# EAGLE board OnStep Box BRD (EAGLE 9.6.2)
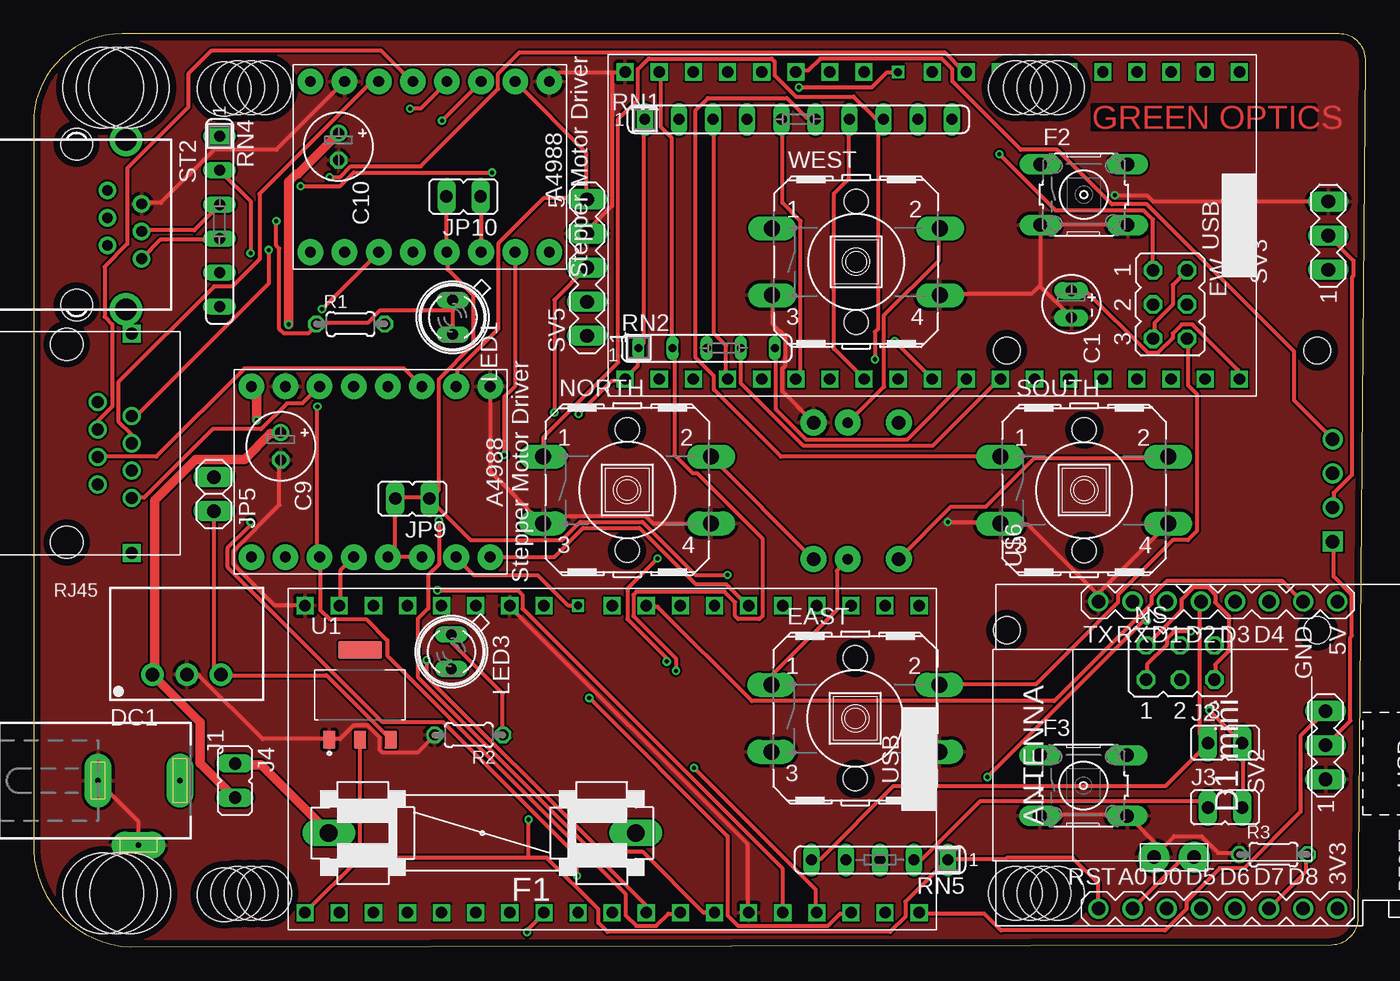
[diagram p0: board, top side]
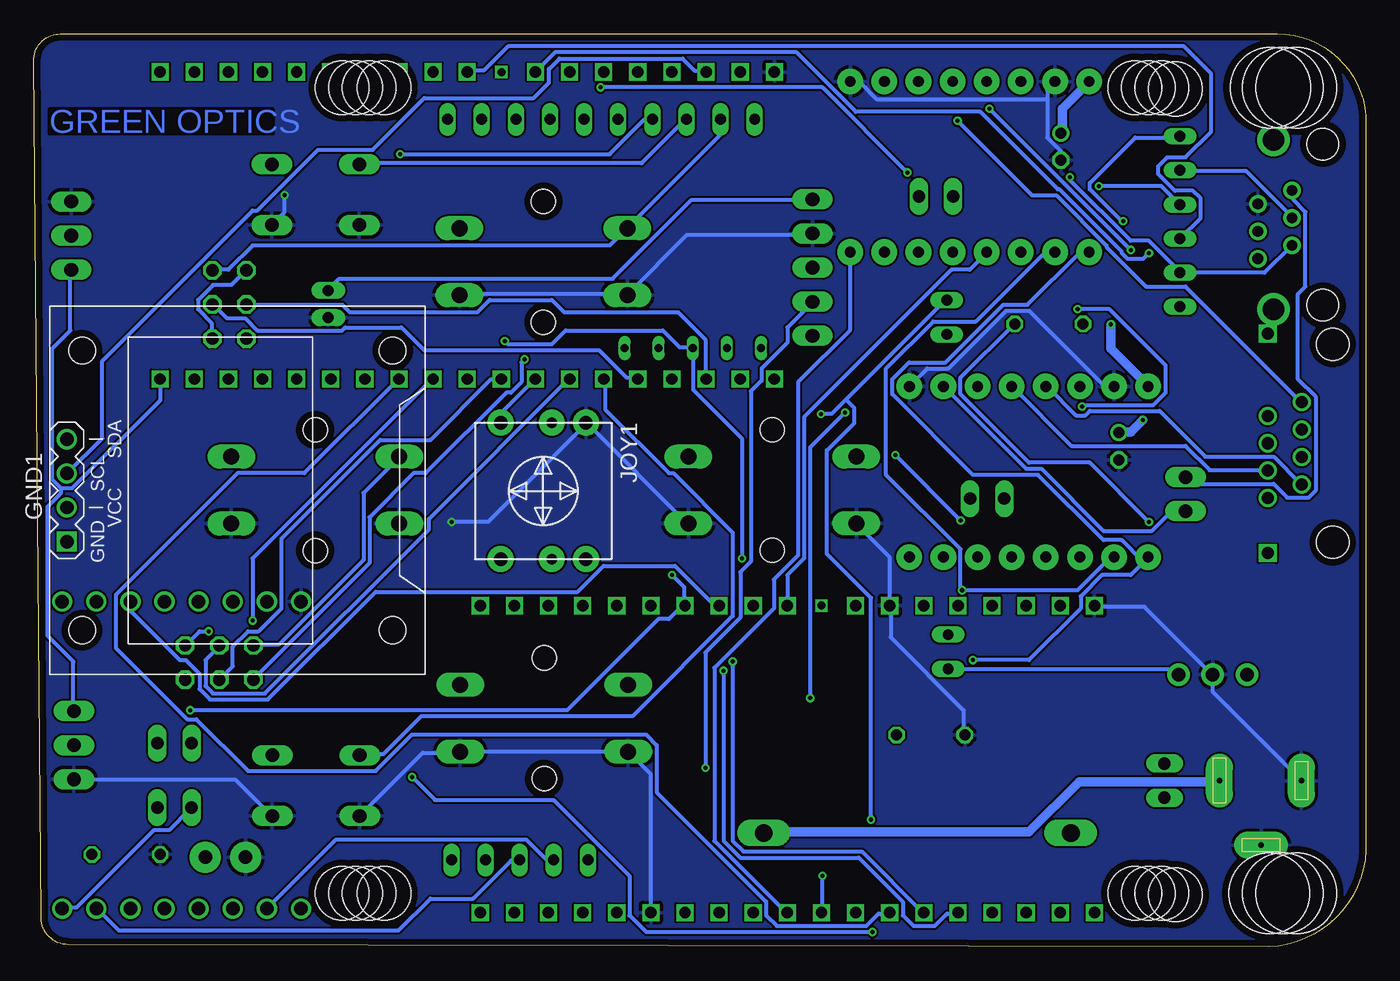
[diagram p1: board, bottom side, seen from below]

Size 99.18 x 68.01 mm. Coordinates in mm from the lower left corner, seen from the top.
Outline: 97.18,67.99 7.2,67.99 arc90 0,61.89 0,7.9 arc90 7.21,0 96.62,0.18 arc89 98.62,2.16 99.18,65.97 arc91 97.18,67.99
Copper layers (1*16): Top 0.035mm / dielectric 1.6mm / Bottom 0.035mm
Design rules "Elecrow_2-layer_PCB_eagle_rule": minimum track width 6mil, minimum drill 12mil, track to track 6mil, track to pad 6mil, pad to pad 6mil, via to via 8mil, smd to smd 0mil, copper to edge 20mil, drill to drill 10mil, minimum pad ring 6mil, minimum via ring 6mil, stop-mask expansion 0mil, vias tented up to drill 100mil, thermal gap 10mil
Net classes: 0 default: width 0.3 mm; 1 24v: width 0.7 mm; 2 SPM: width 0.3 mm; 3 New Class: width 0.7 mm
Holes 6 mm at 6.2,3.99 6.2,63.99 5.2,63.99 7.1,63.99 5.2,3.99 7.2,3.99
Holes 4 mm at 16.2,3.99 16.2,63.99 75.2,3.99 75.2,63.99 15.2,63.99 17.2,63.99 15.2,3.99 17.2,3.99 74.2,3.99 76.2,3.99 74.2,63.99 76.2,63.99 14.2,3.89 73.1,3.99 73.1,63.99 14.2,63.89

## Footprints (pad centres in the part's own frame; a part is rotated, then mirrored left to right if it is on the bottom)
E2-4 = drill 0.813 pad 1.27 long: + -1.016,0; - 1.016,0
E2-5 = drill 0.813 pad 1.27: + -1.016,0 | drill 0.813 pad 1.27 octagon: - 1.016,0
CERAMIC_CAPACITOR = drill 1 pad 2.3: P$1 0,0; P$2 0,3
SIP3 = drill 1 pad 1.676: 1 -2.54,0; 2 0,0; 3 2.54,0
B3F-40XX = drill 1.194 long: 1 -6.248,2.489; 2 6.248,2.489; 3 -6.248,-2.489; 4 6.248,-2.489 | hole 1.803: 0,-4.496; 0,4.496
JP3Q = drill 0.914 octagon: 1 -2.54,-1.27; 2 -2.54,1.27; 3 0,-1.27; 4 0,1.27; 5 2.54,-1.27; 6 2.54,1.27
FUSE = drill 1.321 long: 1 -11.43,0; 2 11.43,0
B3F-10XX = drill 1.016 long: 1 -3.251,2.261; 2 3.251,2.261; 3 -3.251,-2.261; 4 3.251,-2.261
DISPLAY-OLED-128X64-I2C = drill 1 square: 1 -3.81,12.7 | drill 1: 2 -1.27,12.7; 3 1.27,12.7; 4 3.81,12.7 | hole 2: -10.414,11.557; 10.414,11.557; 10.414,-11.557; -10.414,-11.557
DCJ0202 = drill 0.4 pad 2 long: 1 0,3.1; 2 4.8,0; 3 0,-3
JP1 = drill 0.914 long: 1 0,-1.27; 2 0,1.27
JOYSTICK = drill 1 pad 1.93: 1 -5.08,3.175; 3 -5.08,-3.175; 4 5.08,-3.175; 6 5.08,3.175 | drill 0.8 pad 1.93: 2 -5.08,0.635; 5 5.08,0.635
1X02 = drill 1.016 long: 1 -1.27,0; 2 1.27,0
SFH480 = drill 0.813 long: A 1.27,0; K -1.27,0
0204/5 = drill 0.813 octagon: 1 -2.54,0; 2 2.54,0
PJ-J0 = drill 0.9: 1 0,0; 2 1.02,2.54; 3 2.04,0; 4 3.06,2.54; 5 4.08,0; 6 5.1,2.54; 7 6.12,0; 8 7.14,2.54 | drill 0.9 square: 9 -4.095,0; 10 12.255,0 | hole 2.4: -3.295,4.84; 11.455,4.84
SIL10 = drill 0.813 long: 1 -11.43,0; 2 -8.89,0; 3 -6.35,0; 4 -3.81,0; 5 -1.27,0; 6 1.27,0; 7 3.81,0; 8 6.35,0; 9 8.89,0; 10 11.43,0
SIP5 = drill 0.6 long: 1 -5.09,-0.03; 2 -2.55,-0.03; 3 -0.01,-0.03; 4 2.53,-0.03; 5 5.07,-0.03
SIL6 = drill 0.813 long: 1 -6.35,0; 2 -3.81,0; 3 -1.27,0; 4 1.27,0; 5 3.81,0; 6 6.35,0
SIL5 = drill 0.813 long: 1 -5.08,0; 2 -2.54,0; 3 0,0; 4 2.54,0; 5 5.08,0
YH-55-10 = drill 0.8 pad 1.3: 1 -2.54,2.3; 2 -1.54,4.84; 3 -0.5,2.3; 4 0.5,4.84; 5 1.54,2.3; 6 2.54,4.84 | drill 1.6 pad 2.184: S1 -6.3,3.68; S2 6.3,3.68 | hole 2.36: -6,0; 6,0
MA03-1 = drill 1.016 long: 1 -2.54,0; 2 0,0; 3 2.54,0
MA05-1 = drill 1.016 long: 1 -5.08,0; 2 -2.54,0; 3 0,0; 4 2.54,0; 5 5.08,0
SOT229P700X180-4N = smd 0.93 x 1.31: 1 -2.29,-3.345; 2 0,-3.345; 3 2.29,-3.345 | smd 3.24 x 1.31: 4 0,3.345
ESP32 = drill 0.85 square: 3.3V 1.27,46.99; 5V 1.27,1.27; EN 1.27,44.45; GND1 1.27,13.97; GND2 24.13,46.99; GND3 24.13,31.75; GPIO0 24.13,13.97; GPIO2 24.13,11.43; GPIO4 24.13,16.51; GPIO5 24.13,24.13; GPIO6 24.13,1.27; GPIO7 24.13,3.81; GPIO8 24.13,6.35; GPIO9 1.27,8.89; GPIO10 1.27,6.35; GPIO11 1.27,3.81; GPIO12 1.27,16.51; GPIO13 1.27,11.43; GPIO14 1.27,19.05; GPIO15 24.13,8.89; GPIO16 24.13,19.05; GPIO17 24.13,21.59; GPIO19 24.13,29.21; GPIO21 24.13,34.29; GPIO22 24.13,41.91; GPIO23 24.13,44.45; GPIO25 1.27,26.67; GPIO26 1.27,24.13; GPIO27 1.27,21.59; GPIO32 1.27,31.75; GPIO33 1.27,29.21; GPIO34 1.27,36.83; GPIO35 1.27,34.29; GPIO36 1.27,41.91; GPIO39 1.27,39.37; RX 24.13,36.83; TX 24.13,39.37 | drill 0.6 square: GPIO18 24.13,26.67
A4988_STEP = drill 0.8 pad 1.905: 1A 6.35,-1.27; 1B 6.35,-3.81; 2A 6.35,1.27; 2B 6.35,3.81; /EN -6.35,8.89; /RST -6.35,-1.27; /SLP -6.35,-3.81; DIR -6.35,-8.89; GND 6.35,6.35; GND2 6.35,-8.89; MS1 -6.35,6.35; MS2 -6.35,3.81; MS3 -6.35,1.27; STEP -6.35,-6.35; VDD 6.35,-6.35; VMOT 6.35,8.89
WEMOS-D1-MINI = drill 1: JP1.1 -11.43,9.525; JP1.2 -11.43,6.985; JP1.3 -11.43,4.445; JP1.4 -11.43,1.905; JP1.5 -11.43,-0.635; JP1.6 -11.43,-3.175; JP1.7 -11.43,-5.715; JP1.8 -11.43,-8.255; JP2.1 11.43,9.525; JP2.2 11.43,6.985; JP2.3 11.43,4.445; JP2.4 11.43,1.905; JP2.5 11.43,-0.635; JP2.6 11.43,-3.175; JP2.7 11.43,-5.715; JP2.8 11.43,-8.255

## Placement (x,y rotation side)
C1  100uF  [E2-4]  77.24,47.87 270 top
C9  100uF  [E2-5]  18.4,37.29 270 top
C10  100uF  [E2-5]  22.7,59.59 270 top
CERAMIC_CAPACITOR1  CERAMIC_CAPACITOR  [CERAMIC_CAPACITOR]  86.4,6.69 90 top
DC1  R-78C5.0-1.0  [SIP3]  11.4,20.29 0 top
EAST  [B3F-40XX]  61.17,17.03 0 top
EW  [JP3Q]  84.6,47.84 270 top
F1  [FUSE]  33.4,8.49 180 top
F2  [B3F-10XX]  78.19,56.02 0 top
F3  [B3F-10XX]  78.16,12.02 0 top
GND1  DISPLAY-OLED-128X64-I2C  [DISPLAY-OLED-128X64-I2C]  84.01,34 90 bottom
J1  DCJ0202  [DCJ0202]  7.8,12.39 270 top
J2  [JP1]  88.7,15.19 270 top
J3  [JP1]  88.7,10.39 270 top
J4  [JP1]  15,12.39 180 top
JOY1  JOYSTICK  [JOYSTICK]  61.24,33.96 270 bottom
JP5  [1X02]  13.42,33.72 270 top
JP9  [JP1]  28.2,33.39 90 top
JP10  [JP1]  32,55.89 90 top
LED1  [SFH480]  31.2,46.89 270 top
LED3  [SFH480]  31.1,21.99 270 top
NORTH  [B3F-40XX]  44.19,34.03 0 top
NS  [JP3Q]  85.36,21.19 0 top
R1  10k  [0204/5]  23.6,46.39 0 top
R2  10k  [0204/5]  32.4,15.79 180 top
R3  10k  [0204/5]  92.3,6.89 0 top
RJ45  C-00159_RJ45_AKITUKI  [PJ-J0]  7.31,33.43 90 top
RN1  [SIL10]  56.93,61.63 0 top
RN2  [SIP5]  50.12,44.63 0 top
RN4  [SIL6]  13.84,54.02 270 top
RN5  [SIL5]  63,6.49 180 top
SOUTH  [B3F-40XX]  78.21,34.02 0 top
ST2  YH-55-10  [YH-55-10]  3.2,53.79 270 top
SV2  [MA03-1]  96.18,15.03 90 top
SV3  [MA03-1]  96.38,52.97 90 top
SV5  [MA05-1]  41.2,50.59 90 top
U1  AMS1117-3.3  [SOT229P700X180-4N]  24.3,18.79 0 top
U$1  ESP32  [ESP32]  67.2,1.29 90 top
U$3  A4988_STEP  [A4988_STEP]  29.5,58.09 90 top
U$4  A4988_STEP  [A4988_STEP]  25.1,35.39 90 top
U$6  WEMOS-D1-MINI  [WEMOS-D1-MINI]  88.8,14.29 90 top
U$7  ESP32  [ESP32]  91.03,41.02 90 top
WEST  [B3F-40XX]  61.23,51.02 0 top

## Library data of the parts
C1 J1 = akihabara
C9 C10 = rcl; SPICEPREFIX: C
CERAMIC_CAPACITOR1 = capacitor
DC1 = dc-dc-converter
EAST NORTH SOUTH WEST = switch-omron; MF: OMRON COMPONENTS USA; MPN: B3F-4000; OC_FARNELL: 176434; OC_NEWARK: 36K3105
EW J2-J4 JP9 JP10 NS = jumper
F1 = special
F2 F3 = switch-omron; MPN: B3F-1000; OC_FARNELL: 176432; OC_NEWARK: 36M3542
GND1 U$6 = diy-modules
JOY1 = dp_devices
JP5 = pinhead
LED1 LED3 = LED
R1-R3 = rcl; SPICEPREFIX: R
RJ45 = Akizuki
RN1 RN4 RN5 = resistor-sil; OC_FARNELL: unknown; OC_NEWARK: unknown
RN2 = resistor-sip
ST2 = con-wenzhou-yihua; OC_FARNELL: unknown; OC_NEWARK: unknown
SV2 SV3 SV5 = con-lstb; OC_FARNELL: unknown; OC_NEWARK: unknown
U1 = AMS1117-3.3; AVAILABILITY: In Stock; DESCRIPTION: LDO Voltage Regulators 800MA LDO LINEAR REG; MF: Advanced Monolithic Systems; MP: AMS1117-3.3; PACKAGE: SOT-223 Seeed Technology; PRICE: None
U$1 U$7 = ESP32
U$3 U$4 = IC

## Nets
5V: U$6.JP2.8
24V [24v]: F1.1 J1.1
24V2 [24v]: F1.2 J4.1
24V3 [24v]: C9.+ C10.+ DC1.1 J4.2 U$3.VMOT U$4.VMOT
+5V: C1.+ DC1.3 JP5.2 LED3.A SV2.3 SV3.1 SV5.5 U1.3 U$1.5V U$3.VDD U$4.VDD U$7.5V
DE1+: RN4.5 ST2.5 U$7.GPIO17
DE1-: RN4.3 ST2.4 U$7.GPIO18
DE+: RN2.5 U$1.GPIO33 U$7.GPIO27
DE-: RN2.4 U$1.GPIO32 U$7.GPIO14
GND: C1.- C9.- C10.- CERAMIC_CAPACITOR1.P$2 DC1.2 EAST.3 EAST.4 F2.3 F2.4 F3.3 F3.4 J1.2 J1.3 JOY1.1 NORTH.3 NORTH.4 R2.2 R3.1 SOUTH.3 SOUTH.4 ST2.2 SV2.1 SV3.3 SV5.4 U1.1 U$1.GND1 U$1.GND2 U$1.GND3 U$3.GND U$3.GND2 U$4.GND U$4.GND2 U$6.JP2.1 U$7.GND2 WEST.3 WEST.4
N$1: GND1.1 SV2.2
N$2: LED3.K R2.1
N$3: R1.2 U$1.GPIO25
N$8: SV5.3 U$1.GPIO10
N$9: SV5.2 U$1.GPIO9
N$13: U$1.GPIO12 U$3./EN U$4./EN
N$14: U$1.GPIO13 U$3.MS1 U$4.MS1
N$15: U$1.GPIO14 U$3.MS2 U$4.MS2
N$20: JP10.1 U$3./SLP
N$21: U$1.GPIO26 U$3.DIR
N$22: U$1.GPIO27 U$3.STEP
N$23: U$1.GPIO23 U$4.MS3
N$24: J2.2 J3.2 JP9.1 JP9.2 JP10.2 U$1.GPIO4 U$3./RST U$4./RST U$4./SLP
N$25: J3.1 RN5.2 U$6.JP1.8
N$27: U$1.GPIO18 U$4.STEP
N$28: RJ45.4 U$4.1B
N$29 [SPM]: RJ45.5 U$3.2B
N$30 [SPM]: RJ45.8 U$3.1B
N$31: GND1.2 SV3.2
N$32 [SPM]: RJ45.7 U$3.1A
N$33: RN5.3 U$6.JP1.7
N$34 [SPM]: RJ45.6 U$3.2A
N$35: U$1.GPIO5 U$3.MS3
N$36: R3.2 U$6.JP1.6
N$37: CERAMIC_CAPACITOR1.P$1 RN5.4 U$6.JP1.2
N$38: U$1.GPIO0 U$4.DIR
N$40 [SPM]: RJ45.2 U$4.2A
N$42 [SPM]: RJ45.1 U$4.2B
N$45: J2.1 RN5.5 U$6.JP2.4
N$46 [SPM]: RJ45.3 U$4.1A
N$47: GND1.3 U$7.GPIO22
N$51: GND1.4 U$7.GPIO21
N$53: EW.3 U$7.GPIO36
N$54: EAST.2 EW.1 EW.6 RN1.4
N$55: NS.2 NS.5 RN1.6 SOUTH.1
N$58: JOY1.2 WEST.2
N$59: EAST.1 JOY1.5
N$60: NORTH.1 NS.1 NS.6 RN1.8
N$61: JP5.1 ST2.1
N$67: F2.1 RN1.3 U$7.GPIO39
N$68: F3.1 RN1.5 U$7.GPIO35
N$70: NS.3 U$7.GPIO25
N$71: NS.4 U$7.GPIO32
N$72: EW.2 EW.5 RN1.2 WEST.1
N$73: EW.4 U$7.GPIO34
N$74: JOY1.6 NORTH.2
N$75: JOY1.4 SOUTH.2
N$77: JOY1.3 RN1.7 U$7.GPIO33
RA1+: RN4.4 ST2.6 U$7.GPIO5
RA1-: RN4.2 ST2.3 U$7.GPIO19
RA+: RN2.3 U$1.GPIO35 U$7.GPIO26
RA-: RN2.2 U$1.GPIO34 U$7.GPIO23
RXD: U$1.GPIO17 U$6.JP2.7
TXD: U$1.GPIO16 U$6.JP2.6
VCC: LED1.A LED1.K R1.1 RN1.1 RN2.1 RN4.1 RN5.1 U1.2 U$1.3.3V U$6.JP1.1 U$7.3.3V

## Tracks (layer width: path | path; a pad name or v marks a point on that pad's centre or on a via)
24V
  Bottom 0.7: F1.1 44.76,8.58 25.08,8.58 21.35,12.31 10.95,12.31 J1.1
24V2
  Top 0.7: J4.1 15.02,13.56 16.94,13.56 21.92,8.58 F1.2
24V3  (via drill 0.3)
  Top 0.7: v16.6,39.23 16.6,41.38 16.26,41.72 U$4.VMOT | J4.2 14.9,11.18 12.42,13.67 12.42,16.72 8.91,20.23 DC1.1 9.02,20.57 9.02,33.24 12.08,36.29 15.7,36.29 17.62,38.21 18.3,38.21 C9.+ | v18.98,46.36 18.98,56.99 19.54,57.55 19.65,57.55 22.59,60.49 C10.+
  Bottom 0.7: C10.+ 22.59,60.61 22.59,62.42 20.67,64.34 U$3.VMOT | v16.6,39.23 17.5,38.33 18.3,38.33 C9.+ | v18.98,46.36 18.98,44.55 16.26,41.83 U$4.VMOT
+5V
  Top 0.3: U1.3 26.55,15.48 21.8,20.23 14,20.23 DC1.3 13.89,20.34 13.43,20.8 13.43,32.45 JP5.2 | U$3.VDD 35.94,64.34 41.14,59.14 41.14,55.74 SV5.5 41.03,55.74 37.98,55.74 34.58,52.35 34.58,46.02 31.53,42.96 31.53,41.83 U$4.VDD | C1.+ 77.33,48.84 78.35,48.84 82.99,44.21 83.67,44.21 84.8,45.34 84.8,45.68 85.48,46.36 86.27,46.36 89.66,42.96 89.66,42.4 U$7.5V | U$1.5V 66.02,2.47 70.77,2.47 72.02,1.23 84.23,1.23 85.82,2.81 85.82,3.38 88.31,5.87 90.12,5.87 94.3,10.05 94.3,15.71 96.11,17.52 SV2.3
  Bottom 0.3: LED3.A 31.08,20.68 14.34,20.68 14,20.34 DC1.3 | JP5.2 13.43,32.45 14.45,32.45 15.92,30.97 19.54,30.97 24.18,35.61 25.31,35.61 31.42,41.72 U$4.VDD | 97.13,34.14 97.81,34.82 97.81,44.55 96.45,45.9 96.45,50.32 SV3.1 | 97.13,34.14 96.34,34.14 89.78,40.7 89.78,42.28 U$7.5V | 97.13,34.14 97.13,33.8 98.15,32.78 98.15,23.17 96.22,21.25 96.22,17.63 SV2.3 | SV5.5 41.26,55.63 50.19,55.63 56.07,49.75 76.43,49.75 77.22,48.96 C1.+
DE1+  (via drill 0.3)
  Top 0.3: v22.03,57.33 22.82,57.33 23.61,58.12 28.81,58.12 34.58,63.89 34.58,65.02 36.17,66.6 67.83,66.6 69.19,65.24 69.42,65.24 U$7.GPIO17
  Bottom 0.3: ST2.5 5.52,52.24 7.55,50.2 13.77,50.2 RN4.5 13.89,50.32 16.15,52.58 17.5,52.58 22.03,57.1 v22.03,57.33
DE1-  (via drill 0.3)
  Top 0.3: v56.98,64 62.41,64 63.54,65.13 64.33,65.13 U$7.GPIO18 | v34.13,57.67 23.84,57.67 22.82,56.65 v19.88,56.65 | ST2.4 8.12,53.37 11.96,53.37 13.77,55.18 RN4.3
  Bottom 0.3: v56.98,64 40.46,64 v34.13,57.67 | v19.88,56.65 15.24,56.65 13.89,55.29 RN4.3
DE+  (via drill 0.3)
  Top 0.3: RN2.5 55.28,44.55 55.28,40.02 57.54,37.76 65.01,37.76 69.53,42.28 U$7.GPIO27 | v36.73,1.12 36.73,1.23 37.98,2.47 U$1.GPIO33 | v71,12.65 82.65,24.3 v82.88,24.3
  Bottom 0.3: v36.73,1.12 53.58,1.12 54.83,2.36 54.83,5.3 60.48,10.96 69.3,10.96 v71,12.65 | v82.88,24.3 82.88,28.94 69.53,42.28 U$7.GPIO27
DE-
  Top 0.3: RN2.4 52.68,44.55 52.68,41.95 57.32,37.31 66.93,37.31 71.91,42.28 U$7.GPIO14
  Bottom 0.3: U$1.GPIO32 35.49,2.47 36.28,2.47 37.18,1.57 43.86,1.57 44.65,2.36 44.65,3.38 52.79,11.52 52.79,15.03 53.58,15.82 71,15.82 73.72,13.11 83.22,13.11 87.06,16.95 87.74,16.95 93.06,22.27 93.06,26.22 84.01,35.27 79.03,35.27 72.02,42.28 U$7.GPIO14
GND  (via drill 0.3)
  Top 0.3: 43.07,65.13 39.11,65.13 38.43,64.45 U$3.GND2 | 43.07,65.13 43.97,65.13 U$7.GND2 | 43.07,65.13 43.07,55.18 41.26,53.37 41.26,53.14 SV5.4 | ST2.2 8.12,55.4 9.47,55.4 13.43,59.36 18.07,59.36 23.05,64.34 U$3.GND | 74.96,49.18 77.22,46.92 C1.- | 74.96,49.18 74.96,53.71 F2.3 75.07,53.82 81.41,53.82 F2.4 | v80.5,55.97 82.88,55.97 83.33,55.52 96.34,55.52 SV3.3 | WEST.4 67.49,48.62 74.28,48.62 74.85,49.18 74.96,49.18 | SOUTH.4 84.35,31.43 79.37,26.45 79.37,25.77 U$6.JP2.1 79.26,26.22 74.05,31.43 72.02,31.43 SOUTH.3 71.91,31.65 v68.06,31.65 | WEST.3 55.05,48.51 55.05,46.36 55.96,45.45 55.96,43.3 55.73,43.08 55.73,41.38 57.99,39.12 JOY1.1 | R3.1 89.66,7 88.19,7 86.95,8.24 84.91,8.24 83.44,6.77 CERAMIC_CAPACITOR1.P$2 83.89,7.34 81.52,9.71 F3.4 81.41,9.83 74.96,9.83 F3.3 | C9.- 18.3,36.18 18.3,32.9 14.9,29.5 14.9,28.49 17.96,25.43 20.11,25.43 U$1.GND2 | J1.2 7.78,7.68 7.78,9.37 4.84,12.31 J1.3 | R2.2 29.83,15.71 28.59,14.46 25.99,14.46 25.76,14.69 25.76,15.59 24.86,16.5 23.84,16.5 22.82,15.48 22.03,15.48 U1.1 21.92,15.48 17.05,15.48 12.3,20.23 11.51,20.23 DC1.2 | U$4.GND2 34.02,41.72 34.02,35.39 37.86,31.54 NORTH.3 38.09,31.54 38.65,32.11 45.55,32.11 46.12,31.54 50.42,31.54 NORTH.4 | U$1.GND1 53.13,2.59 53.13,7.68 35.49,25.32 U$1.GND3
  Bottom 0.3: 23.73,63.1 23.73,63.77 23.16,64.34 U$3.GND | 23.73,63.1 23.73,60.27 22.71,59.25 C10.- | 23.73,63.1 36.39,63.1 37.64,64.34 38.32,64.34 U$3.GND2 | v80.5,55.97 80.5,54.73 81.41,53.82 F2.4 | NORTH.4 50.53,31.54 57.99,39.01 JOY1.1 58.11,38.89 65.35,31.65 v68.06,31.65 | WEST.4 67.38,48.62 55.05,48.62 WEST.3 54.94,48.62 50.53,53.03 41.26,53.03 SV5.4 | U$1.GND1 53.24,2.59 53.24,12.88 54.83,14.46 EAST.3 55.05,14.58 67.27,14.58 EAST.4 67.49,14.46 70.21,14.46 74.85,9.83 F3.3 | SV2.1 96.11,12.43 84.12,12.43 81.52,9.83 F3.4 | J1.3 4.84,12.43 11.4,18.99 11.4,20.23 DC1.2 11.51,20.34 16.49,25.32 20.11,25.32 U$1.GND2 | U$4.GND 18.86,41.83 19.54,41.83 25.08,47.37 26.78,47.37 31.08,43.08 32.66,43.08 33.9,41.83 U$4.GND2 | NORTH.3 37.86,31.43 35.49,29.05 35.49,25.43 U$1.GND3 35.37,25.32 35.37,23.06 29.95,17.63 29.95,15.82 R2.2
  pour Bottom: -0.2,61.09 arc-90 6.9,68.19 9.7,68.19 97.6,68.19 arc-90 99,66.79 99,65.09 arc90 98.6,64.69 98.6,2.09 arc-90 96.6,0.09 95.1,0.09 arc-90 95,-0.01 6.5,-0.01 arc-90 -0.2,6.69 -0.2,7.29 arc90 0,7.49 0,59.89
  pour Top: -0.4,61.19 arc-90 6.5,68.09 9.2,68.09 98.2,68.09 arc-90 99.2,67.09 99.2,63.79 arc90 98.5,63.09 98.5,1.69 arc-90 96.7,-0.11 96.1,-0.11 arc90 95.9,0.09 7.1,0.09 arc-90 0,7.19 0,7.89 arc-90 -0.4,8.29 -0.4,60.59
N$1
  Top 0.3: GND1.1 96.79,30.18 96.79,27.58 98.15,26.22 98.15,23.17 98.03,23.06 98.03,16.84 96.22,15.03 SV2.2
N$2
  Top 0.3: LED3.K 31.19,23.17 31.19,22.61 34.92,18.87 34.92,15.82 R2.1
N$3  (via drill 0.3)
  Top 0.3: v16.15,31.65 16.15,31.43 14.45,29.73 14.45,28.26 25.99,16.72 30.51,16.72 40.46,6.77 v40.46,5.3
  Bottom 0.3: v16.15,31.65 20.56,36.06 25.08,36.06 30.17,41.15 30.17,42.4 26.21,46.36 R1.2 | v40.46,5.3 40.46,2.59 U$1.GPIO25
N$8  (via drill 0.3)
  Top 0.3: v41.37,18.53 51.66,8.24 51.66,2.36 52.45,1.57 59.13,1.57 60.03,2.47 60.82,2.47 U$1.GPIO10 | v38.77,39.8 38.77,48.17 41.14,50.54 SV5.3
  Bottom 0.3: v41.37,18.53 41.37,37.2 v38.77,39.8
N$9  (via drill 0.3)
  Top 0.3: v49.17,13.33 58.22,4.28 58.22,2.59 U$1.GPIO9
  Bottom 0.3: v49.17,13.33 49.17,21.93 46.57,24.53 46.57,27.92 45.78,28.71 45.78,41.38 44.99,42.17 44.99,43.08 43.07,45 43.07,46.13 41.26,47.94 SV5.2
N$13  (via drill 0.3)
  Top 0.3: v29.27,21.36 29.27,20.12 42.27,7.11 45.33,7.11 49.85,2.59 50.64,2.59 U$1.GPIO12
  Bottom 0.3: v29.27,21.36 25.08,21.36 21.24,25.21 21.24,26.11 19.65,27.69 17.5,27.69 16.26,28.94 U$4./EN 16.6,28.71 18.18,30.3 19.54,30.3 24.4,35.16 29.27,35.16 35.26,41.15 35.26,42.28 34.02,43.53 31.3,43.53 27.01,47.83 25.2,47.83 21.35,51.67 20.67,51.67 U$3./EN
N$14  (via drill 0.3)
  Top 0.3: v30.06,26.56 36.05,26.56 36.39,26.22 36.39,25.21 55.73,5.87 55.73,2.59 U$1.GPIO13
  Bottom 0.3: U$4.MS1 18.86,28.94 19.09,28.94 21.46,26.56 v30.06,26.56 30.17,26.56 30.17,29.62 35.71,35.16 35.71,43.08 32.21,46.58 29.04,46.58 23.95,51.67 23.16,51.67 U$3.MS1
N$15  (via drill 0.3)
  Top 0.3: U$1.GPIO14 48.04,2.47 47.25,2.47 46.35,1.57 44.88,1.57 44.08,2.36 44.08,3.94 26.33,21.7 26.33,22.83 24.74,24.42 22.03,24.42 21.35,25.09 21.35,28.94 U$4.MS2 21.24,29.17 21.12,29.28 v21.12,40.25 | v21.46,47.49 25.65,51.67 U$3.MS2
  Bottom 0.3: v21.46,47.49 19.09,47.49 14.9,43.3 14.9,41.27 15.81,40.36 21.01,40.36 v21.12,40.25
N$20
  Top 0.3: JP10.1 33.34,55.86 33.34,51.79 U$3./SLP
N$21
  Bottom 0.3: U$1.GPIO26 43.18,2.59 48.49,7.9 48.49,20.8 44.08,25.21 44.08,27.36 42.27,29.17 42.27,42.06 38.43,45.9 38.43,51.67 U$3.DIR
N$22  (via drill 0.3)
  Top 0.3: v30.17,31.77 30.17,28.49 29.38,27.69 29.38,25.21 28.59,24.42 28.59,20.12 45.55,3.15 45.55,2.59 U$1.GPIO27 | v35.04,36.63 35.04,40.93 35.83,41.72 35.83,51.67 U$3.STEP
  Bottom 0.3: v35.04,36.63 v30.17,31.77
N$23
  Top 0.3: U$1.GPIO23 22.82,25.43 22.82,28.03 23.73,28.94 U$4.MS3
N$24  (via drill 0.3)
  Top 0.3: JP10.2 30.74,55.86 30.74,51.79 U$3./RST 30.85,51.67 30.85,50.43 32.77,48.51 32.77,44.89 30.17,42.28 30.17,34.03 29.61,33.46 JP9.1 | U$4./SLP 28.81,29.05 26.44,29.05 U$4./RST 26.89,29.17 26.89,33.24 JP9.2 27.01,33.46 29.38,33.46 JP9.1 | J3.2 90,10.39 90,15.14 J2.2 89.89,15.25 v87.51,17.63 | v51.66,27.69 49.29,27.69 45.33,31.65 40.69,31.65 39.33,30.3 32.55,30.3 29.49,33.35 JP9.1
  Bottom 0.3: v51.66,27.69 50.76,26.79 50.76,25.43 U$1.GPIO4 50.87,25.43 51.89,24.42 52.68,24.42 59.46,17.63 v87.51,17.63
N$25
  Top 0.3: RN5.2 65.57,6.55 66.14,6.55 70.44,10.84 86.95,10.84 87.4,10.39 J3.1
  Bottom 0.3: U$6.JP1.8 97.01,2.93 96,2.93 90.23,8.69 89.1,8.69 87.51,10.28 J3.1
N$27
  Top 0.3: U$1.GPIO18 40.46,25.43 39.79,25.43 37.52,27.69 32.77,27.69 31.53,28.94 U$4.STEP
N$28
  Top 0.3: RJ45.4 4.84,36.52 9.14,36.52 15.7,43.08 27.57,43.08 28.81,41.83 U$4.1B
N$29
  Top 0.3: RJ45.5 7.21,37.53 7.21,38.21 6.31,39.12 6.31,42.06 13.43,49.18 14.79,49.18 16.83,51.22 16.83,56.08 25.08,64.34 25.65,64.34 U$3.2B
N$30  (via drill 0.3)
  Top 0.3: v30.4,61.51 33.23,64.34 U$3.1B
  Bottom 0.3: v30.4,61.51 24.86,55.97 23.05,55.97 19.31,52.24 19.31,52.12 16.37,49.18 13.43,49.18 4.84,40.59 RJ45.8
N$31
  Top 0.3: GND1.2 96.79,32.78 96.79,33.8 98.15,35.16 98.15,49.86 98.26,49.98 98.26,51.11 96.45,52.92 SV3.2
N$32  (via drill 0.3)
  Top 0.3: v17.5,51.9 17.5,49.41 7.67,39.57 7.33,39.57 RJ45.7 | v28.02,62.42 28.81,62.42 30.74,64.34 U$3.1A
  Bottom 0.3: v28.02,62.42 v17.5,51.9
N$33
  Bottom 0.3: RN5.3 63.08,6.43 63.65,6.43 66.48,3.6 69.64,3.6 72.02,1.23 92.83,1.23 94.41,2.81 U$6.JP1.7
N$34
  Top 0.3: RJ45.6 4.84,38.55 4.84,39.23 5.86,40.25 5.86,46.36 5.29,46.92 5.29,50.65 6.99,52.35 6.99,58.01 11.51,62.53 11.51,65.02 13.21,66.71 25.87,66.71 28.14,64.45 U$3.2A
N$35
  Bottom 0.3: U$1.GPIO5 43.07,25.43 43.07,27.69 41.82,28.94 41.82,39.46 30.85,50.43 29.49,50.43 28.25,51.67 U$3.MS3
N$36
  Top 0.3: R3.2 94.75,6.88 94.75,5.64 92.04,2.93 U$6.JP1.6
N$37
  Top 0.3: CERAMIC_CAPACITOR1.P$1 86.38,6.66 85.59,6.66 81.86,2.93 U$6.JP1.2
  Bottom 0.3: RN5.4 60.48,6.55 61.05,6.55 62.52,8.02 76.66,8.02 81.75,2.93 U$6.JP1.2
N$38
  Top 0.3: U$1.GPIO0 53.13,25.43 51.55,27.02 49.29,27.02 45.1,31.2 40.92,31.2 38.77,29.05 34.02,29.05 U$4.DIR
N$40
  Bottom 0.3: RJ45.2 4.84,34.48 6.87,36.52 11.96,36.52 15.36,39.91 20.56,39.91 20.9,39.57 21.58,39.57 23.73,41.72 U$4.2A
N$42
  Top 0.3: RJ45.1 7.33,33.46 8.23,33.46 13.32,38.55 16.94,38.55 18.86,40.48 19.99,40.48 21.24,41.72 U$4.2B
N$45
  Top 0.3: RN5.5 57.99,6.55 58.56,6.55 63.99,11.97 84.23,11.97 87.4,15.14 J2.1 87.4,15.25 86.84,15.82 86.84,25.66 U$6.JP2.4
N$46
  Bottom 0.3: RJ45.3 7.33,35.5 11.62,35.5 13.43,37.31 21.92,37.31 26.33,41.72 U$4.1A
N$47
  Bottom 0.3: U$7.GPIO22 49.17,65.24 49.96,65.24 50.87,66.15 60.03,66.15 60.82,65.36 60.82,64.34 61.95,63.21 70.1,63.21 73.94,59.36 78.01,59.36 82.54,54.84 82.88,54.84 94.07,43.64 94.07,37.87 96.67,35.27 GND1.3
N$51
  Top 0.3: U$7.GPIO21 56.75,65.24 57.66,65.24 58.56,66.15 67.61,66.15 68.4,65.36 68.4,64.45 73.49,59.36 76.2,59.36 80.28,55.29 82.88,55.29 93.85,44.32 93.85,40.7 96.67,37.87 GND1.4
N$53
  Bottom 0.3: U$7.GPIO36 49.17,42.4 49.17,45.23 51.21,47.26 59.69,47.26 60.6,48.17 65.23,48.17 66.14,47.26 75.64,47.26 76.2,47.83 EW.3
N$54  (via drill 0.3)
  Top 0.3: v71.91,59.02 76.09,54.84 82.65,54.84 83.33,54.16 83.33,50.43 EW.1 | EAST.2 67.49,19.55 74.62,19.55 80.73,25.66 80.73,26.22 84.8,30.3 85.93,30.3 86.61,30.97 86.61,41.15 85.93,41.83 85.93,45.23 EW.6
  Bottom 0.3: v71.91,59.02 56.3,59.02 53.7,61.62 RN1.4 | EW.6 85.93,45.34 85.93,46.47 86.95,47.49 86.95,48.17 85.82,49.3 84.46,49.3 83.44,50.32 EW.1
N$55
  Top 0.3: NS.5 87.97,20 87.97,21.02 88.98,22.04 88.98,24.64 87.97,25.66 87.97,26.22 87.4,26.79 86.38,26.79 85.48,25.89 85.48,25.09 82.88,22.49 NS.2 | RN1.6 58.11,61.74 57.54,61.74 56.07,63.21 50.19,63.21 49.29,62.3 49.29,43.87 50.64,42.51 50.64,41.49 55.62,36.52 71.91,36.52 SOUTH.1
  Bottom 0.3: NS.2 82.76,22.49 80.95,22.49 74.62,28.83 74.62,33.8 72.02,36.4 SOUTH.1
N$58
  Top 0.3: WEST.2 67.38,53.48 67.38,51.11 63.31,47.04 63.31,41.72 60.71,39.12 JOY1.2
N$59
  Top 0.3: EAST.1 54.94,19.55 54.94,20.23 59.8,25.09 59.8,28.03 60.6,28.83 JOY1.5
N$60  (via drill 0.3)
  Top 0.3: v86.16,23.51 84.91,23.51 84.35,22.94 84.35,22.49 82.88,21.02 82.88,20 NS.1 | NORTH.1 37.98,36.52 37.98,37.99 43.52,43.53 43.52,61.62 44.99,63.1 44.99,65.36 45.78,66.15 54.94,66.15 55.17,65.92 55.17,64.9 56.75,63.32 61.05,63.32 62.63,61.74 63.2,61.74 RN1.8 62.86,61.62 62.86,46.02 62.63,45.79 v62.63,43.76
  Bottom 0.3: v86.16,23.51 86.84,23.51 87.85,22.49 NS.6 | v62.63,43.76 62.86,43.53 62.86,42.06 63.65,41.27 63.99,41.27 69.98,35.27 70.89,35.27 74.17,31.99 74.17,28.6 82.76,20 NS.1
N$61
  Bottom 0.3: ST2.1 5.4,56.31 5.4,55.63 4.5,54.73 4.5,49.18 5.06,48.62 5.06,42.28 3.71,40.93 3.71,34.03 4.27,33.46 5.86,33.46 6.87,34.48 12.87,34.48 13.32,34.93 JP5.1
N$67
  Top 0.3: RN1.3 50.64,61.62 50.64,45.68 51.55,44.77 51.55,42.4 U$7.GPIO39
  Bottom 0.3: F2.1 74.85,58.35 53.92,58.35 50.64,61.62 RN1.3
N$68
  Top 0.3: RN1.5 55.73,61.62 55.73,55.4 57.09,54.05 57.09,42.74 56.75,42.4 U$7.GPIO35
  Bottom 0.3: F3.1 74.85,14.35 73.15,14.35 70.32,17.18 54.6,17.18 47.14,24.64 47.14,30.86 51.55,35.27 51.89,35.27 56.64,40.02 56.64,42.28 U$7.GPIO35
N$70
  Bottom 0.3: U$7.GPIO25 64.44,42.28 65.12,42.28 69.64,37.76 73.38,37.76 80.73,30.41 80.73,25.21 82.42,23.51 83.22,23.51 84.35,22.38 84.35,20.91 85.25,20 NS.3
N$71
  Bottom 0.3: U$7.GPIO32 59.35,42.28 69.76,31.88 69.76,31.09 81.97,18.87 85.82,18.87 86.38,19.44 86.38,21.36 85.36,22.38 NS.4
N$72
  Top 0.3: EW.5 83.44,45.34 83.44,46.47 84.8,47.83 84.8,49.3 85.82,50.32 EW.2
  Bottom 0.3: RN1.2 48.04,60.49 54.94,53.59 WEST.1 55.05,53.48 56.3,52.24 82.88,52.24 84.69,50.43 85.82,50.43 EW.2
N$73
  Bottom 0.3: U$7.GPIO34 54.26,42.4 55.05,42.4 57.09,44.43 70.1,44.43 71.79,46.13 75.98,46.13 76.2,45.9 82.54,45.9 83.44,46.81 84.8,46.81 85.82,47.83 EW.4
N$74
  Top 0.3: NORTH.2 50.53,36.4 57.99,28.94 JOY1.6
N$75
  Top 0.3: SOUTH.2 84.35,36.4 74.51,36.4 70.89,32.78 68.29,32.78 64.44,28.94 JOY1.4
N$77
  Top 0.3: RN1.7 60.71,61.62 60.71,57.21 59.58,56.08 59.58,44.55 61.73,42.4 U$7.GPIO33
  Bottom 0.3: JOY1.3 64.33,39.12 64.33,39.8 61.84,42.28 U$7.GPIO33
RA1+
  Top 0.3: RN4.4 13.77,52.69 9.47,52.69 8.12,51.33 ST2.6
  Bottom 0.3: U$7.GPIO5 66.82,65.24 65.69,65.24 63.88,67.05 13.55,67.05 11.51,65.02 11.51,60.72 13.43,58.8 14.79,58.8 15.47,58.12 15.47,57.55 14.22,56.31 12.87,56.31 12.3,55.74 12.3,54.27 13.77,52.8 RN4.4
RA1-  (via drill 0.3)
  Top 0.3: v16.15,51.67 16.15,55.52 13.89,57.78 RN4.2
  Bottom 0.3: RN4.2 13.77,57.78 8.91,57.78 5.52,54.39 ST2.3 | v16.15,51.67 16.6,51.22 17.73,51.22 18.18,51.67 18.18,51.79 22.82,56.42 22.93,56.42 28.7,62.19 37.98,62.19 42.39,66.6 60.37,66.6 61.73,65.24 U$7.GPIO19
RA+  (via drill 0.3)
  Top 0.3: v64.1,45.11 66.82,42.4 U$7.GPIO26 | v47.14,21.25 47.14,21.47 44.2,24.42 44.2,26.68 v46.46,28.94
  Bottom 0.3: v64.1,45.11 63.88,44.89 60.6,44.89 59.58,45.9 52.34,45.9 51.1,44.66 50.19,44.66 RN2.3 50.08,44.55 50.08,41.49 46.46,37.87 v46.46,28.94 | v47.14,21.25 47.14,7.9 46.35,7.11 37.52,7.11 33,2.59 U$1.GPIO35
RA-  (via drill 0.3)
  Top 0.3: U$7.GPIO23 46.68,65.13 46.68,61.06 47.48,60.27 47.48,44.66 RN2.2 47.7,44.55 47.7,36.63 49.06,35.27 49.4,35.27 54.26,30.41 54.26,24.64 54.04,24.42 52.45,24.42 52.23,24.64 52.23,25.66 51.43,26.45 44.88,26.45 44.65,26.22 44.65,24.64 47.82,21.47 v47.82,20.57
  Bottom 0.3: v47.82,20.57 47.82,7.9 46.57,6.66 37.75,6.66 34.47,3.38 34.47,2.36 33.68,1.57 32.09,1.57 31.19,2.47 30.4,2.47 U$1.GPIO34
RXD
  Top 0.3: U$1.GPIO17 45.67,25.32 46.46,25.32 53.47,18.31 75.98,18.31 83.22,25.55 83.22,26.11 84.35,27.24 92.94,27.24 94.41,25.77 U$6.JP2.7
TXD
  Bottom 0.3: U$1.GPIO16 48.15,25.43 48.49,25.43 51.43,28.37 56.75,28.37 58.67,26.45 73.72,26.45 81.75,18.42 86.04,18.42 86.84,19.21 86.84,20.34 87.85,21.36 88.31,21.36 91.92,24.98 91.92,25.66 U$6.JP2.6
VCC  (via drill 0.3)
  Top 0.3: RN1.1 45.44,61.62 45.44,45 45.1,44.66 RN2.1 44.99,44.55 44.99,43.3 44.08,42.4 U$7.3.3V 43.97,42.17 43.07,42.17 v40.58,39.68 | 31.19,47.37 31.19,48.05 LED1.K | 31.19,47.37 31.19,45.68 LED1.A | 31.19,47.37 25.76,47.37 24.86,46.47 21.12,46.47 R1.1 21.01,46.24 20.45,45.68 18.64,45.68 18.3,46.02 18.3,52.01 18.07,52.24 v18.07,54.05 | 24.29,6.66 24.29,15.37 U1.2 | 24.29,6.66 20.22,2.59 U$1.3.3V | U$6.JP1.1 79.26,2.93 79.26,4.74 77.33,6.66 72.47,6.66 72.36,6.55 68.17,6.55 RN5.1 67.95,6.43 64.89,3.38 64.89,2.25 63.76,1.12 42.73,1.12 42.05,1.8 42.05,2.81 38.2,6.66 36.84,6.66 | 36.84,6.66 24.29,6.66 | 36.84,6.66 v36.84,9.49
  Bottom 0.3: v18.07,54.05 18.18,54.05 20.56,56.42 20.56,56.87 17.17,60.27 13.89,60.27 RN4.1 | v40.58,39.68 39.79,39.68 38.71,40.76 | 38.71,40.76 31.3,48.17 LED1.K | 38.71,40.76 38.09,40.14 38.09,39.01 40.12,36.97 40.12,29.28 36.84,26 v36.84,9.49

## Text on the board
Top: GREEN OPTICS
Bottom: GREEN OPTICS